# Altium PCB DS172-1.0-A滴定计数器.PcbDoc
Units mm, origin at the board's own origin, x right, y up, seen from the top; angles counter-clockwise.
Board outline 48 x 61 mm, 2 copper layers (Top Layer, Bottom Layer), stack 1.581 mm thick; 36 components, 41 nets, 164 pads, 50 vias.
Unrouted connection lines stored in the file: 33.
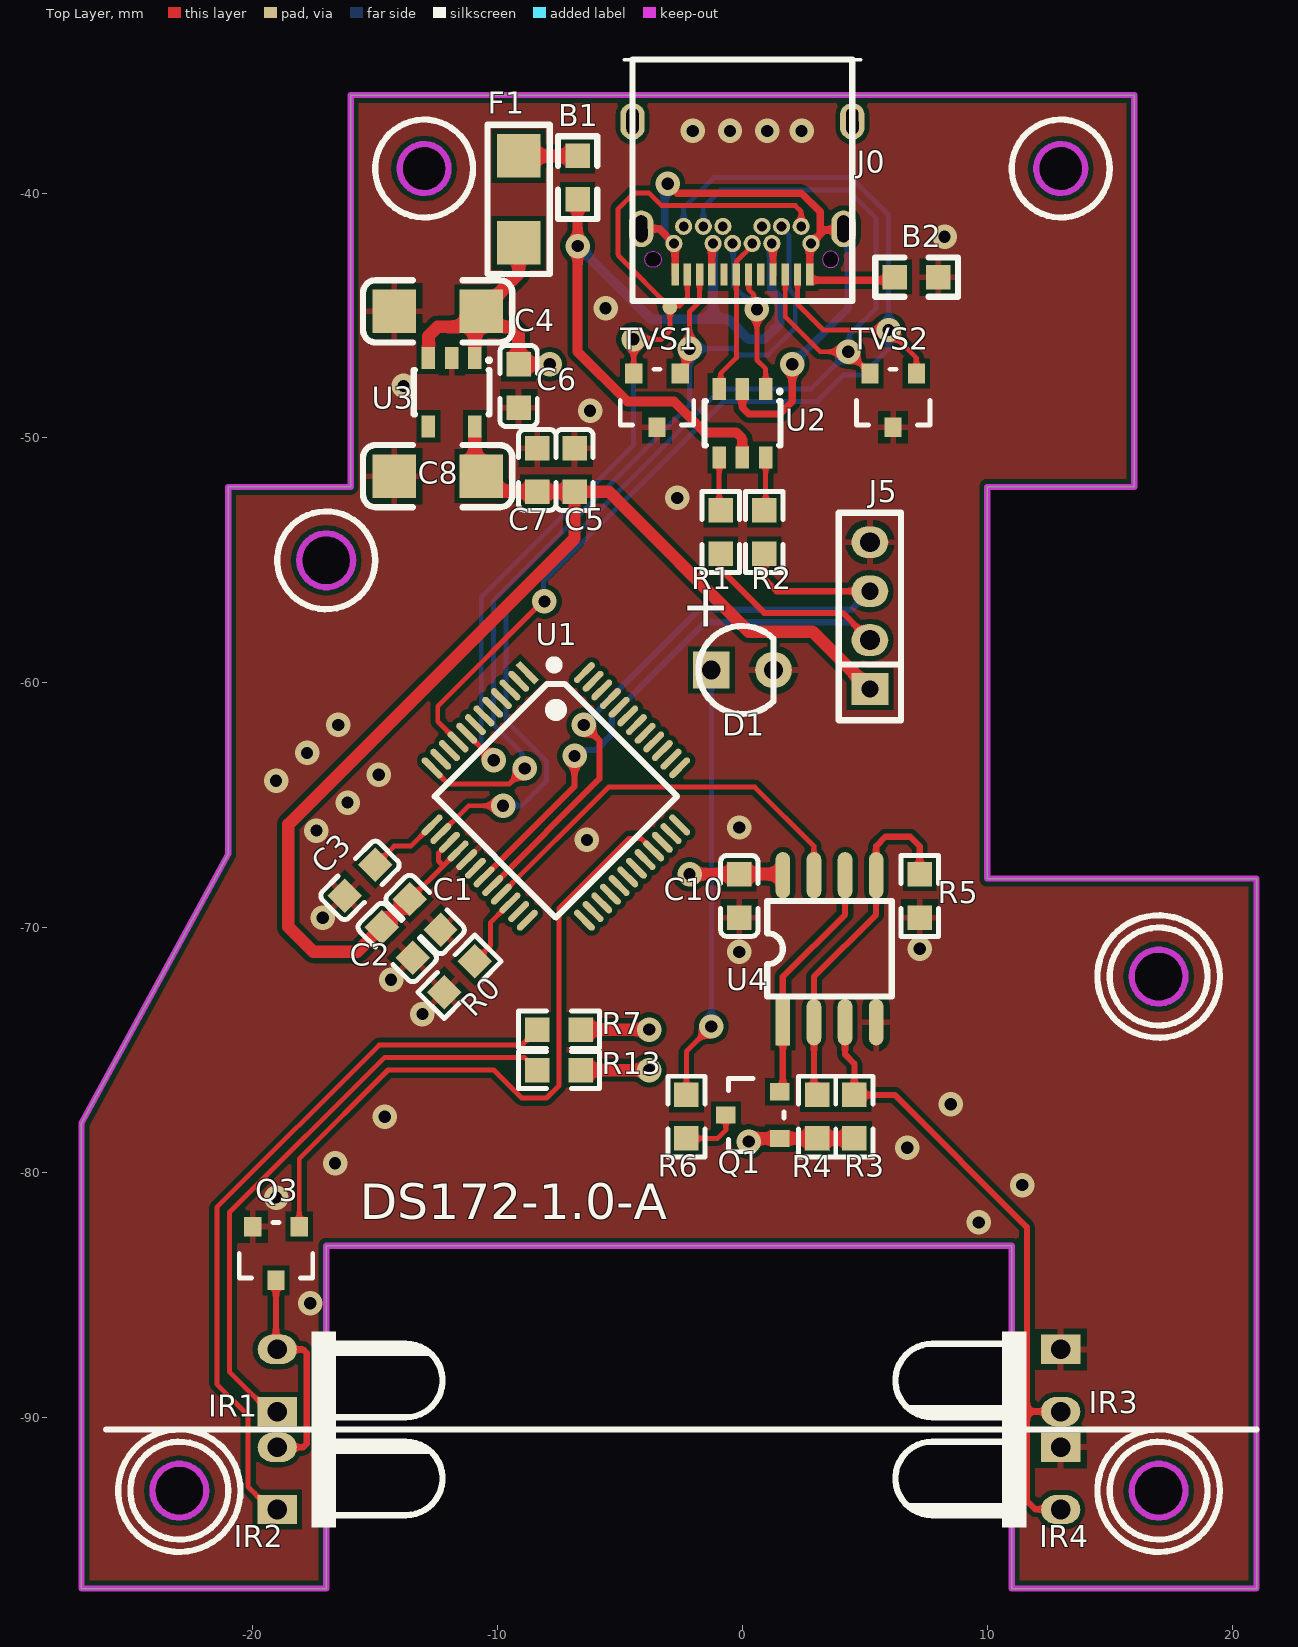
[diagram p0: Top Layer view]
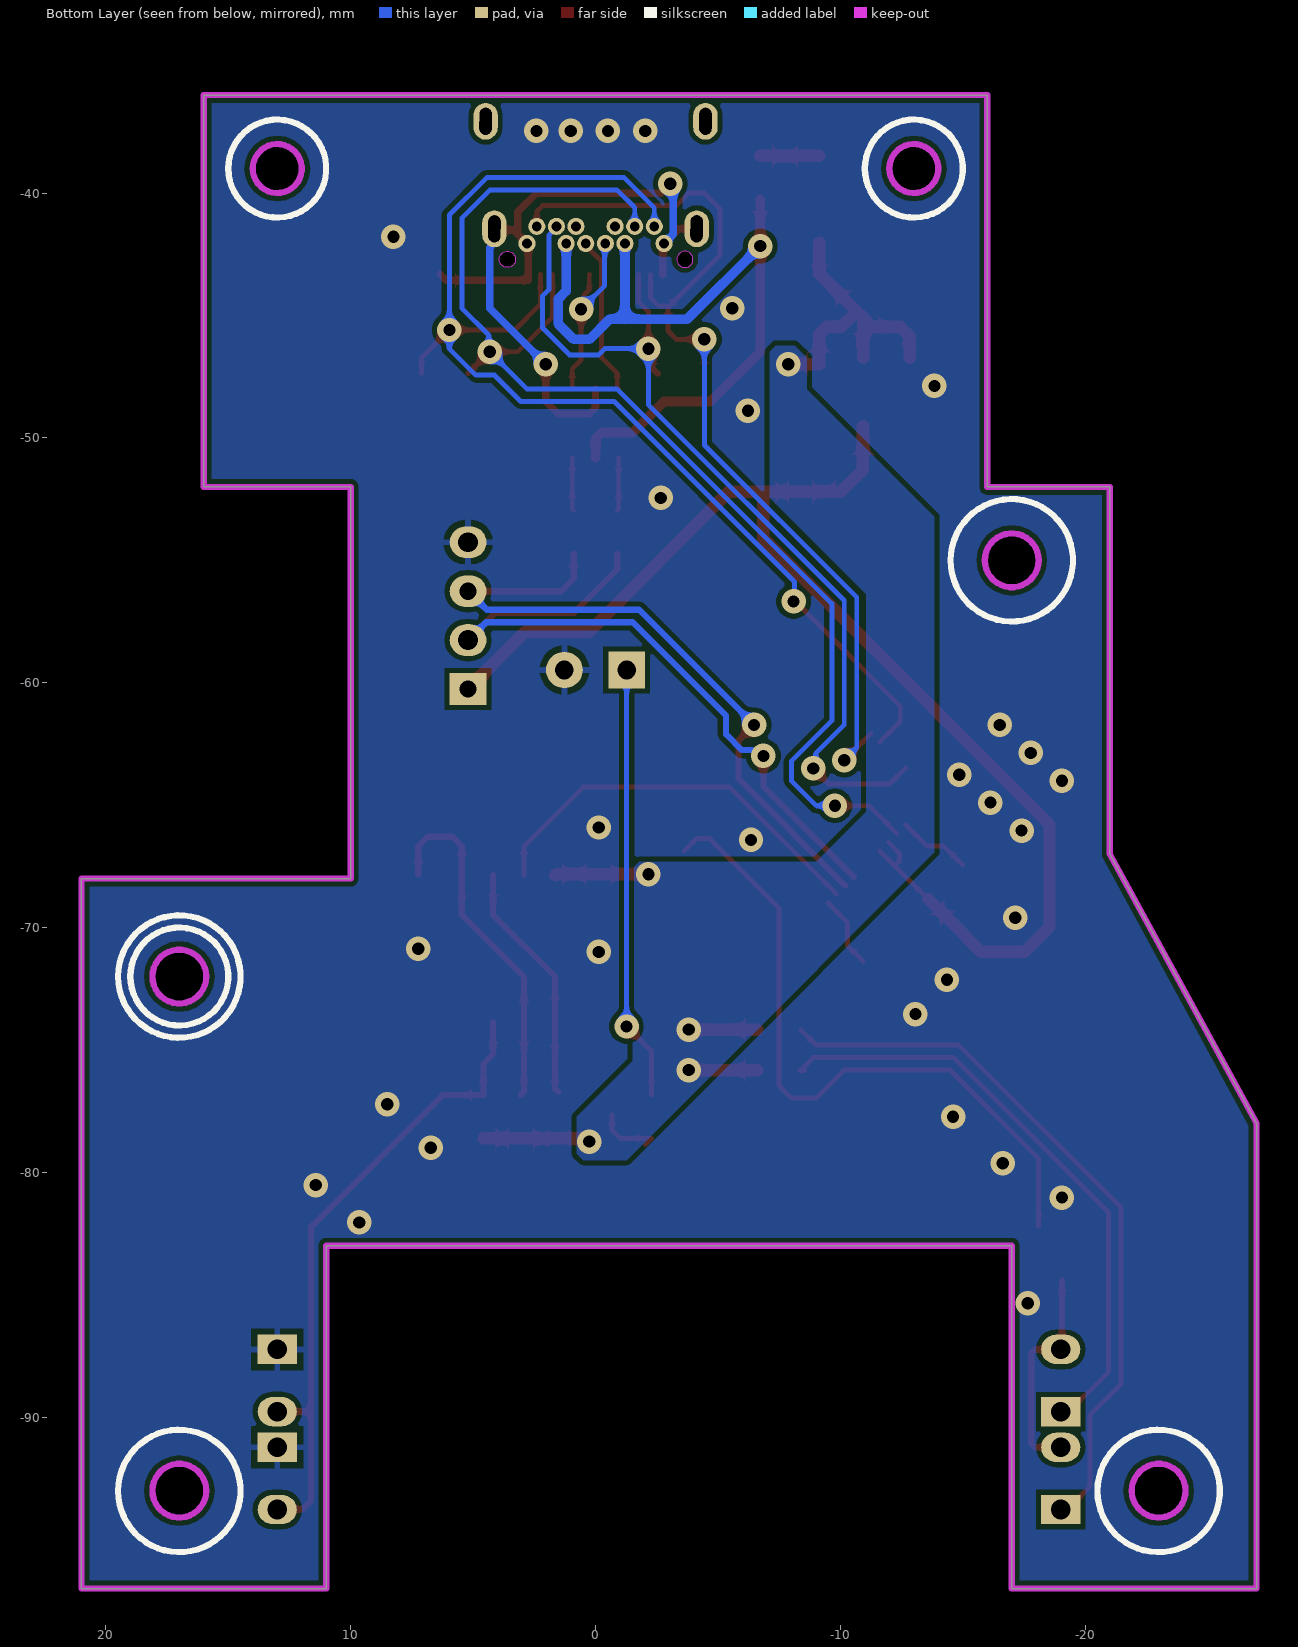
[diagram p1: Bottom Layer view, seen from below]

## Layer stack, top to bottom
Top Solder: solder mask 0.0102, Solder Resist, Dk 3.5
Top Layer: signal copper 0.0356
Dielectric 1: dielectric 1.51, FR-4, Dk 4.8
Bottom Layer: signal copper 0.0356
Bottom Solder: solder mask 0.0102, Solder Resist, Dk 3.5

## Board outline
-27,-97 -17,-97 -17,-83 11,-83 11,-97 21,-97 21,-68 10,-68 10,-52 16,-52 16,-36 -16,-36 -16,-52 -21,-52 -21,-67 -27,-78
cut-out: -14,-39 ccw(c-13,-39) -13,-40 ccw(c-13,-39) -12,-39 ccw(c-13,-39) -13,-38 ccw(c-13,-39)
cut-out: -21.9,-93 cw(c-23,-93) -23,-94.1 cw(c-23,-93) -24.1,-93 cw(c-23,-93) -23,-91.9 cw(c-23,-93)
cut-out: 15.9,-93 ccw(c17,-93) 17,-94.1 ccw(c17,-93) 18.1,-93 ccw(c17,-93) 17,-91.9 ccw(c17,-93)
cut-out: 15.9,-72 ccw(c17,-72) 17,-73.1 ccw(c17,-72) 18.1,-72 ccw(c17,-72) 17,-70.9 ccw(c17,-72)
cut-out: -18.1,-55 ccw(c-17,-55) -17,-56.1 ccw(c-17,-55) -15.9,-55 ccw(c-17,-55) -17,-53.9 ccw(c-17,-55)
cut-out: 12,-39 ccw(c13,-39) 13,-40 ccw(c13,-39) 14,-39 ccw(c13,-39) 13,-38 ccw(c13,-39)

## Design rules (kind name [scope] priority, off if disabled: settings)
Clearance [All] p1: gap=0.2 ignorepadtopadclearanceinfootprint=TRUE
MinimumSolderMaskSliver [All] p1: minsoldermaskwidth=0.2
PolygonConnect GND [All] p1: thpad.connectstyle=Relief thpad.reliefconductorwidth=0.254 thpad.reliefentries=4 thpad.polygonreliefangle="90 Angle" thpad.airgapwidth=0.254 smdpad.connectstyle=Relief smdpad.reliefconductorwidth=0.254 smdpad.reliefentries=4 smdpad.polygonreliefangle="90 Angle" smdpad.airgapwidth=0.254 via.connectstyle=Direct via.reliefconductorwidth=0.254 via.reliefentries=4 via.polygonreliefangle="90 Angle" via.airgapwidth=0.254
PolygonConnect VSS [InNet('VSS') vs InNet('VSS')] p2: thpad.connectstyle=Relief thpad.reliefconductorwidth=0.508 thpad.reliefentries=4 thpad.polygonreliefangle="90 Angle" thpad.airgapwidth=0.254 smdpad.connectstyle=Relief smdpad.reliefconductorwidth=0.508 smdpad.reliefentries=4 smdpad.polygonreliefangle="90 Angle" smdpad.airgapwidth=0.254 via.connectstyle=Direct via.reliefconductorwidth=0.508 via.reliefentries=4 via.polygonreliefangle="90 Angle" via.airgapwidth=0.254
RoutingVias [All] p1: holewidth=0.6 width=1 viastyle="Through Hole" minholewidth=0.4 minwidth=0.8 maxholewidth=1 maxwidth=2
SilkToSilkClearance [All] p1: silktosilkclearance=0.1
SilkToSolderMaskClearance [IsPad] p1: minsilkscreentomaskgap=0.05 clearancetoexposedcopper=TRUE
SolderMaskExpansion [All] p1: expansion=0.102 istentingtop=FALSE
Width [All] p1: maxlimit=1 minlimit=0.2 preferedwidth=0.2
27 further rules are at their usual default settings.

## Classes and differential pairs
net class U1_Nets: ADC0 ADC1 DAC_OUT Dis1_red_EN Dis2_green_EN Dis3_blue_EN GND I2C1_SCL I2C1_SDA IRT_EN KEY_HOME NetU1_1 NetU1_2 NetU1_3 NetU1_4 NetU1_7 NetU1_11 NetU1_23 NetU1_24 NetU1_25 NetU1_26 NetU1_30 NetU1_32 NetU1_39 NetU1_40 NetU1_41 NetU1_42 NetU1_43 NetU1_44 NetU1_45 NetU1_46 NetU1_47 NetU1_48 P3.0/D-/RxD P3.1/D+/TxD P3.3 SPI1/SPI2_CS SPI1_MISO SPI1_MOSI SPI1_SCK SPI2_MISO SPI2_MOSI SPI2_SCK UCAP USART2_RXD USART2_TXD VCC_3V3_MCU
net class R0_Nets: GND P3.3
net class C3_Nets: GND UCAP
net class U4_Nets: GND KEY_HOME NetIR3_2 NetQ1_2 NetR4_1 VCC_5V
net class TVS2_Nets: GND SPI1/SPI2_CS SPI1_SCK
net class TVS1_Nets: GND SPI1_MISO SPI1_MOSI
net class R7_Nets: NetIR2_1 VCC_5V
net class R6_Nets: NetD1_1 NetQ1_3
net class R5_Nets: GND NetR4_1
net class R4_Nets: NetR4_1 VCC_5V
net class R3_Nets: NetIR3_2 VCC_5V
net class R2_Nets: P3.1/D+/TxD USB_D+
net class R1_Nets: P3.0/D-/RxD USB_D-
net class Q3_Nets: Dis_red_EN GND IRT_EN NetIR1_2
net class Q1_Nets: NetQ1_2 NetQ1_3 VCC_5V
net class IR4_Nets: GND NetIR3_2
net class IR3_Nets: GND NetIR3_2
net class IR2_Nets: NetIR1_2 NetIR2_1
net class IR1_Nets: NetIR1_1 NetIR1_2
net class C1_Nets: GND VCC_3V3_MCU
net class C2_Nets: GND VCC_3V3_MCU
net class R13_Nets: NetIR1_1 VCC_5V
net class J5_Nets: GND P3.0/D-/RxD P3.1/D+/TxD VCC_3V3_MCU
net class D1_Nets: GND NetD1_1
net class J0_Nets: D+_I/O1 D-_I/O2 NetJ0_A5 NetJ0_A8 NetJ0_B5 NetJ0_B8 SPI1/SPI2_CS SPI1_MISO SPI1_MOSI SPI1_SCK VBUS VSS
net class F1_Nets: NetB1_2 VCC_5V
net class C7_Nets: GND VCC_3V3_MCU
net class C4_Nets: GND VCC_5V
net class B2_Nets: GND VSS
net class B1_Nets: NetB1_2 VBUS
net class U3_Nets: GND VCC_3V3_MCU VCC_5V
net class U2_Nets: D+_I/O1 D-_I/O2 USB_D+ USB_D- VBUS VSS
net class C10_Nets: GND VCC_5V
net class C5_Nets: GND VCC_3V3_MCU
net class C8_Nets: GND VCC_3V3_MCU
net class C6_Nets: GND VCC_5V

## Components (designator, comment, footprint, x,y, rotation, side; value= is the part's Value field where it differs from the comment)
B1 "CBM160808U102" 0603Bead -6.731,-39.37 r90 top
B2 "CBM160808U102" 0603Bead 7.112,-43.434 r0 top
C1 "SMDCAP00013" 0603CAP -12.96,-69.463 r135 top value=100nF
C2 "SMDCAP00012" 0603CAP -14.097,-70.612 r135 top value=4.7uF
C3 "SMDCAP00015" 0603CAP -15.621,-68.072 r45 top value=1uF
C4 "MLCC 10uF 50V ±20％ 1206" 1206CAP -12.446,-44.831 r0 top value=10uF
C5 "SMDCAP00013" 0603CAP -6.858,-51.308 r270 top value=100nF
C6 "SMDCAP00015" 0603CAP -9.144,-47.879 r90 top value=1uF
C7 "SMDCAP00015" 0603CAP -8.382,-51.308 r270 top value=1uF
C8 "MLCC 10uF 50V ±20％ 1206" 1206CAP -12.446,-51.562 r0 top value=10uF
C10 "SMDCAP00013" 0603CAP -0.127,-68.708 r90 top value=100nF
D1 "Φ3 透明发红 DIP2" LED_3mm_red 0,-59.48 r0 top locked value=red
F1 "SMD1206-050C-16V" 1206FUSE -9.144,-40.259 r270 top value="16V /0.5A"
IR1 "IR204-A" LED_IR_W_3mm -19,-88.5 r0 top locked
IR2 "IR204-A" LED_IR_W_3mm -19,-92.5 r0 top locked
IR3 "SE000000002" LED_IR_W_3mm 13,-88.5 r180 top locked value=PT204-6B
IR4 "SE000000002" LED_IR_W_3mm 13,-92.5 r180 top locked value=PT204-6B
J0 "USB_Type_C_24P" USB_TYPE_C_24P_Receptacle 0,-40.2 r180 top locked
J5 "DIP4单排直针  间距2mm 针长11mm 铜" H4 5.207,-60.261 r90 top value=4P
Q1 "SMDIC000037" SOT23 0.424,-77.658 r90 top value=DTC114ECA
Q3 "SMDIC000037" SOT23 -19.05,-83.312 r180 top value=DTC114ECA
R0 "Chip 0R 1/16W ±1％ 0603" 0603RES -11.557,-72.009 r45 top value=0R
R1 "Chip 22R 1/16W ±1％ 0603" 0603RES -0.889,-53.848 r90 top value=22R
R2 "Chip 22R 1/16W ±1％ 0603" 0603RES 0.889,-53.848 r90 top value=22R
R3 "Chip 120K 1/16W ±1％ 0603" 0603RES 4.572,-77.724 r270 top value=120K
R4 "SMDRES00047" 0603RES 3.048,-77.724 r270 top value=4.7K
R5 "SMDRES00034" 0603RES 7.239,-68.707 r90 top value=1K
R6 "SMDRES00034" 0603RES -2.286,-77.724 r270 top value=1K
R7 "SMDRES00015" 0603RES -7.493,-74.168 r0 top value=100R
R13 "SMDRES00015" 0603RES -7.493,-75.819 r0 top value=100R
TVS1 "MMBZ9V1A" SOT23 -3.49,-48.471 r180 top
TVS2 "MMBZ9V1A" SOT23 6.157,-48.471 r180 top
U1 "STC32G12K128_35I LQFP48" LQFP-48 -7.62,-64.643 r315 top value=STC32G12K128
U2 "82400102" SOT23-6 0,-49.4 r180 top
U3 "ME6211C33M5G-N" SOT23-5 -11.877,-48.13 r180 top
U4 "SMDIC000034" SO-8 3.556,-70.866 r90 top value=LM358

## Footprints (in the part's own frame and the unit in brackets; to place one, negate y for a bottom-side part, rotate by r counter-clockwise, add the part's x,y. Pads: shape width x height; smd on the part's side, far side on the other; paste and mask are expansions set on the pad)
0603Bead [mm]
  rect 1x1 smd: 1(-0.889,0) 2(0.889,0)
  silkscreen extent -1.69,-0.8 1.69,0.8, body extent -0.9,-0.48 0.85,0.48, height 0.95
0603CAP [mm]
  rect 1x1 smd: 1(-0.889,0) 2(0.89,0)
  silkscreen extent -1.65,-0.76 1.65,0.76, body extent -0.8,-0.4 0.8,0.4, height 0.3
0603RES [mm]
  rect 1x1 smd: 1(-0.889,0) 2(0.889,0)
  silkscreen extent -1.65,-0.76 1.65,0.76, body extent -0.8,-0.41 0.8,0.41, height 0.51
1206CAP [mil]
  rect 70x70 smd: 1(-70,0) 2(70,0)
  silkscreen extent -120,-50 120,50, body extent -73,-38 73,38, height 47
1206FUSE [mil]
  rect 70x70 smd: 1(-70,0) 2(70,0)
  silkscreen extent -120,-50 120,50, body extent -63,-33 63,33, height 57
H4 [mm]
  rect 1.3x1.5 hole 0.7: 1(0,0)
  oval 1.3x1.5 hole 0.813: 2(2,0) 4(6,0)
  oval 1.3x1.5 hole 0.7: 3(4,0)
  silkscreen extent -1.27,-1.27 7.2,1.27, body extent -0.97,-1 6.98,1, height 6
LED_3mm_red [mm]
  rect 1.5x1.5 hole 0.76: 1(-1.27,0)
  round 1.5 hole 0.76: 2(1.27,0)
  silkscreen extent -1.8,-1.8 1.27,1.8, body extent -1.9,-1.9 1.53,1.9, height 14.89
LED_IR_W_3mm [mm] "Typical RED GaAs LED; 2 Leads"
  rect 1.6x1.2 hole 0.8: 1(0,-1.27)
  oval 1.6x1.2 hole 0.8: 2(0,1.27)
  silkscreen extent 1.4,-2 6.75,2, body extent -0.25,-2 6.5,1.55, height 4
LQFP-48 [mm]
  rect 1.1x0.27 smd mask+0.08: 1(-4.4,2.75)
  oval 1.1x0.27 smd mask+0.08: 2(-4.4,2.25) 3(-4.4,1.75) 4(-4.4,1.25) 5(-4.4,0.75) 6(-4.4,0.25) 7(-4.4,-0.25) 8(-4.4,-0.75) 9(-4.4,-1.25) 10(-4.4,-1.75) 11(-4.4,-2.25) 12(-4.4,-2.75) 25(4.4,-2.75) 26(4.4,-2.25) 27(4.4,-1.75) 28(4.4,-1.25) 29(4.4,-0.75) 30(4.4,-0.25) 31(4.4,0.25) 32(4.4,0.75) 33(4.4,1.25) 34(4.4,1.75) 35(4.4,2.25) 36(4.4,2.75)
  oval 0.27x1.1 smd mask+0.08: 13(-2.75,-4.4) 14(-2.25,-4.4) 15(-1.75,-4.4) 16(-1.25,-4.4) 17(-0.75,-4.4) 18(-0.25,-4.4) 19(0.25,-4.4) 20(0.75,-4.4) 21(1.25,-4.4) 22(1.75,-4.4) 23(2.25,-4.4) 24(2.75,-4.4) 37(2.75,4.4) 38(2.25,4.4) 39(1.75,4.4) 40(1.25,4.4) 41(0.75,4.4) 42(0.25,4.4) 43(-0.25,4.4) 44(-0.75,4.4) 45(-1.25,4.4) 46(-1.75,4.4) 47(-2.25,4.4) 48(-2.75,4.4)
  silkscreen extent -3.95,-3.5 3.5,3.85, body extent -4.51,-4.5 4.5,4.5, height 1.54
SO-8 [mm]
  rect 1.9x0.6 smd: 1(-3,1.905)
  oval 1.9x0.6 smd: 2(-3,0.635) 3(-3,-0.635) 4(-3,-1.905) 5(3,-1.905) 6(3,-0.635) 7(3,0.635) 8(3,1.905)
  silkscreen extent -1.95,-2.54 1.95,2.54, body extent -3.07,-2.44 3.07,2.44, height 1.77
SOT23 [mm]
  rect 0.7x0.8 smd: 1(-0.95,-1.1) 2(0.95,-1.1) 3(0,1.1)
  silkscreen extent -1.5,-1.27 1.5,1, body extent -1.46,-1.17 1.46,1.17, height 1
SOT23-5 [mm] "SOT-23/SC-74A; 5 Leads; Body 3.1 x 3 mm, inc. leads (LxW max)"
  rect 0.55x0.9 smd: 1(-0.95,-1.4) 2(0,-1.4) 3(0.95,-1.4) 4(0.95,1.4) 5(-0.95,1.4)
  silkscreen extent -1.59,-1.36 1.55,0.9, body extent -1.45,-1.4 1.45,1.4, height 1.45
SOT23-6 [mm] "SOT-23/SC-74A; 5 Leads; Body 3.1 x 3 mm, inc. leads (LxW max)"
  rect 0.55x0.9 smd: 1(-0.95,-1.4) 2(0,-1.4) 3(0.95,-1.4) 4(0.95,1.4) 5(0,1.4) 6(-0.95,1.4)
  silkscreen extent -1.59,-1.36 1.55,0.9, body extent -1.45,-1.4 1.45,1.4, height 1.45
USB_TYPE_C_24P_Receptacle [mm]
  oval 1x1.5 hole 0.5 slot 1.1 at 90.5 deg: 0(-4.49,-3.13) 0(-4.13,1.26) 0(4.13,1.26) 0(4.49,-3.13)
  rect 0.3x0.9 smd mask+0.1: A1(-2.75,3.13) A2(-2.25,3.13) A3(-1.75,3.13) A4(-1.25,3.13) A5(-0.75,3.13) A6(-0.25,3.13) A7(0.25,3.13) A8(0.75,3.13) A9(1.25,3.13) A10(1.75,3.13) A11(2.25,3.13) A12(2.75,3.13)
  round 0.7 hole 0.4: B1(2.8,1.86) B2(2.4,1.16) B3(1.6,1.16) B4(1.2,1.86) B5(0.8,1.16) B6(0.4,1.86) B7(-0.4,1.86) B8(-0.8,1.16) B9(-1.2,1.86) B10(-1.6,1.16) B11(-2.4,1.16) B12(-2.8,1.86)
  Keep-Out Layer board cut-out: 3.98,2.51 3.955,2.384 3.883,2.277 3.776,2.205 3.65,2.18 3.65,2.18 3.524,2.205 3.417,2.277 3.345,2.384 3.32,2.51 3.32,2.51 3.345,2.636 3.417,2.743 3.524,2.815 3.65,2.84 3.65,2.84 3.776,2.815 3.883,2.743 3.955,2.636 3.98,2.51
  Keep-Out Layer board cut-out: -3.93,2.51 -3.905,2.384 -3.833,2.277 -3.726,2.205 -3.6,2.18 -3.6,2.18 -3.474,2.205 -3.367,2.277 -3.295,2.384 -3.27,2.51 -3.27,2.51 -3.295,2.636 -3.367,2.743 -3.474,2.815 -3.6,2.84 -3.6,2.84 -3.726,2.815 -3.833,2.743 -3.905,2.636 -3.93,2.51
  silkscreen extent -4.48,-5.66 4.48,4.21, body extent -4.87,-5.66 4.88,4.21, height 3.36

## Part data
B1 B2: library part "Chip Ferrite Bead 0606", "贴片磁珠"
C1 C5 C10: library part "MLCC 100nF 50V ±10％ 0603", "贴片电容"
C2: library part "MLCC 4.7uF 50V ±10％ 0603", "贴片电容"
C3 C6 C7: library part "MLCC 1uF 50V ±10％ 0603", "贴片电容"
C4 C8: "贴片电容"
D1: "插件LED"
F1: "贴片自恢复保险丝 16V /0.5A"
IR1 IR2: "红外发射管DIP2 Φ3"
IR3 IR4: library part PT204-6B, "红外接收管DIP2 Φ3"
J5: "单排直针"
Q1 Q3: library part "DTC114ECA SOT-23 长电", "数字晶体管"
R0 R1 R2 R3: "贴片电阻"
R4: library part "Chip 4.7K 1/16W ±1％ 0603", "贴片电阻"
R5 R6: library part "Chip 1K 1/16W ±1％ 0603", "贴片电阻"
R7 R13: library part "Chip 100R 1/16W ±1％ 0603", "贴片电阻"
TVS1 TVS2: library part TVS, "瞬态抑制二极管"
U1: "单片机芯片"
U2: "瞬态抑制二极管(TVS)"
U3: "稳压芯片"
U4: library part "LM358 SOP-8 ST", "运放芯片"

## Free pads (board coordinates)
  round 0.6 smd mask+0.102: 0(-2.961,-44.664)

## Via types
v1: diameter 1, hole 0.5, Top Layer to Bottom Layer, tented both sides, 50 vias

## Nets (pads, with @x,y where several pads share a name; then routed paths per layer and width w, separated by ;. In a path a pad name is that pad's centre, name@x,y a point inside that pad or via, vN(x,y) a via of type N, cw(c..) or ccw(c..) an arc to the next point about the centre after c; other vN are vias at no path point)
ADC0: U1.5
ADC1: U1.6
D+_I/O1: J0.A6 J0.B6 U2.1 | length 8.1
  Top Layer w0.2: J0.A6 0.258,-43.338 0.258,-43.946 0.457,-44.145 0.457,-44.609 v1(0.59,-44.743) 0.59,-46.818 0.95,-47.178 U2.1
  Bottom Layer w0.2: J0.B6 -0.374,-42.086 -0.374,-43.779 v1(0.59,-44.743)
D-_I/O2: J0.A7 J0.B7 U2.3 | length 6.5
  Top Layer w0.2: U2.3 -0.885,-47.935 -0.885,-47.367 -0.25,-46.732 J0.A7 -0.25,-42.796 0.4,-42.146 J0.B7
DAC_OUT: U1.10
Dis1_red_EN: U1.35
Dis2_green_EN: U1.34
Dis3_blue_EN: U1.36
GND: B2.2 C1.1 C2.1 C3.1 C4.1 C5.1 C6.1 C7.1 C8.1 C10.1 D1.2 IR3.1 IR4.1 J5.4 Q3.2 R0.1 R5.1 TVS1.3 TVS2.3 U1.17 U3.2 U4.4
  other v1: -17.653,-85.344 9.652,-82.042 -19.05,-81.026 11.43,-80.518 -16.637,-79.629 6.731,-78.994 -14.605,-77.724 8.509,-77.216 -13.068,-73.533 -14.351,-72.136 -0.127,-70.993 7.239,-70.866 -17.145,-69.596 -6.35,-66.421 -17.399,-66.04 -0.127,-65.913 -16.129,-64.897 -19.05,-64.008 -14.859,-63.754 -17.78,-62.865 -16.51,-61.722 -2.667,-52.451 -6.223,-48.895 -13.843,-47.879 -5.588,-44.704 8.255,-41.783 -2.032,-37.465 -0.508,-37.465 1.016,-37.465 2.413,-37.465
I2C1_SCL: U1.38
I2C1_SDA: U1.37
IRT_EN: Q3.1 U1.33 | length 28.1
  Top Layer w0.2: Q3.1 -18.1,-79.441 -14.478,-75.819 -10.16,-75.819 -9.017,-76.962 -8.001,-76.962 -7.493,-76.454 -7.493,-69.215 -4.632,-66.354 -4.141,-66.354 U1.33
KEY_HOME: U1.21 U4.7 | length 16.8
  Top Layer w0.2: U1.21 -5.471,-64.262 0.508,-64.262 2.921,-66.675 U4.7
NetB1_2: B1.2 F1.1 | length 2.4
  Top Layer w0.508: F1.1 B1.2
NetD1_1: D1.1 R6.1 | length 17.8
  Top Layer w0.2: R6.1 -2.286,-75.057 v1(-1.27,-74.041)
  Bottom Layer w0.2: v1(-1.27,-74.041) D1.1
NetIR1_1: IR1.1 R13.1 | length 24.7
  Top Layer w0.2: IR1.1 -19.323,-89.77 -20.955,-88.138 -20.955,-81.639 -14.627,-75.311 -8.89,-75.311 R13.1
  Top Layer w0.254: R13.1@-8.509,-75.819 R13.1
NetIR1_2: IR1.2 IR2.2 Q3.3 | length 9.1
  Top Layer w0.254: Q3.3 -19.05,-87.18 IR1.2 -17.948,-87.23 -17.799,-87.379 -17.799,-91.081 -17.948,-91.23 IR2.2
NetIR2_1: IR2.1 R7.1 | length 29.6
  Top Layer w0.2: IR2.1 -19.5,-93.27 -19.76,-93.27 -20.193,-92.837 -20.193,-89.916 -21.463,-88.646 -21.463,-81.429 -14.837,-74.803 -9.017,-74.803 R7.1
NetIR3_2: IR3.2 IR4.2 R3.1 U4.3 | length 26.5
  Top Layer w0.254: U4.3 4.191,-75.184 4.572,-75.565 R3.1 6.223,-76.835 11.621,-82.232 11.621,-89.77 ; IR4.2 12.986,-93.756 11.968,-93.756 11.621,-93.408 11.621,-89.77 ; IR3.2 11.621,-89.77
NetQ1_2: Q1.2 U4.1 U4.6 | length 9.9
  Top Layer w0.254: Q1.2 1.651,-76.581 U4.1 1.651,-72.009 4.191,-69.469 U4.6
NetQ1_3: Q1.3 R6.2 | length 2.7
  Top Layer w0.2: R6.2@-2.032,-78.867 R6.2 -1.016,-78.613 -0.676,-78.273 Q1.3
NetR4_1: R4.1 R5.2 U4.2 U4.5 | length 14.5
  Top Layer w0.254: R4.1 2.921,-76.708 U4.2 2.921,-72.009 5.461,-69.469 U4.5 5.461,-66.675 5.842,-66.294 6.858,-66.294 7.239,-66.675 R5.2
P3.0/D-/RxD: J5.2 R1.1 U1.19 | length 29.5
  Top Layer w0.254: U1.19 -6.858,-64.235 v1(-6.858,-62.992) ; R1.1 -0.889,-55.372 0.889,-57.15 4.096,-57.15 J5.2
  Bottom Layer w0.254: v1(-6.858,-62.992) -6.656,-62.992 -6.414,-62.75 -5.981,-62.75 -5.334,-62.103 -5.334,-61.341 -1.524,-57.531 4.477,-57.531 J5.2
P3.1/D+/TxD: J5.3 R2.1 U1.20 | length 28.1
  Top Layer w0.254: U1.20 -5.842,-63.926 -5.842,-62.357 v1(-6.477,-61.722) ; R2.1 0.889,-55.753 1.397,-56.261 J5.3
  Bottom Layer w0.254: v1(-6.477,-61.722) -1.778,-57.023 4.445,-57.023 J5.3
P3.3: R0.2 U1.22 | length 3
  Top Layer w0.2: R0.2 -10.287,-70.739 -10.287,-69.785 U1.22
SPI1/SPI2_CS: J0.A3 J0.B3 TVS2.2 U1.14 | length 52
  Top Layer w0.2: U1.14 -11.183,-65.024 v1(-9.779,-65.024) ; J0.A3 1.75,-45.057 3.175,-46.482 v1(4.318,-46.482) TVS2.2
  Bottom Layer w0.2: v1(-9.779,-65.024) -9.017,-65.024 -8.001,-64.008 -8.001,-63.202 -9.652,-61.551 -9.652,-56.769 -0.889,-48.006 2.794,-48.006 4.366,-46.434 4.366,-45.799 5.461,-44.704 5.461,-41.021 4.318,-39.878 -0.889,-39.878 -1.6,-40.589 J0.B3
SPI1_MISO: J0.A11 J0.B11 pad.0 TVS1.2 U1.8 | length 40.9
  Top Layer w0.2: U1.8 v1(-10.16,-63.164) ; TVS1.2 -4.445,-47.366 v1(-4.445,-45.974) -3.302,-45.974 -2.961,-45.633 pad.0 ; J0.A11 -2.25,-44.287 -2.57,-44.607 -2.904,-44.607 pad.0 ; J0.B11 2.401,-40.754 2.16,-40.513 -3.301,-40.513 -3.809,-40.005 -4.444,-40.005 -5.079,-40.64 -5.079,-42.462 ccw(c-4.879,-42.462) -5.021,-42.604 pad.0
  Bottom Layer w0.2: v1(-10.16,-63.164) -10.668,-62.656 -10.668,-56.515 -4.445,-50.292 v1(-4.445,-45.974)
SPI1_MOSI: J0.A10 J0.B10 TVS1.1 U1.12 | length 38.9
  Top Layer w0.2: U1.12 -12.017,-64.135 -9.525,-64.135 v1(-8.89,-63.5) ; v1(-2.159,-46.355) -2.159,-44.837 -1.75,-44.428 J0.A10
  Top Layer w0.254: TVS1.1 -2.317,-47.148 -2.317,-46.715 -2.159,-46.557 v1(-2.159,-46.355)
  Bottom Layer w0.2: v1(-8.89,-63.5) -9.002,-63.388 -9.002,-62.88 -10.16,-61.722 -10.16,-56.642 -2.159,-48.641 v1(-2.159,-46.355) -0.381,-46.355 -0.127,-46.609 1.061,-46.609 2.159,-45.511 2.159,-44.197 1.905,-43.943 1.905,-41.727 1.6,-41.422 J0.B10
SPI1_SCK: J0.A2 J0.B2 TVS2.1 U1.9 | length 50.1
  Top Layer w0.2: U1.9 -12.446,-61.585 -12.446,-60.96 -8.168,-56.682 v1(-8.088,-56.682) ; J0.A2 2.25,-44.541 3.302,-45.593 v1(5.969,-45.593) 7.107,-46.731 TVS2.1
  Bottom Layer w0.2: v1(-8.088,-56.682) -8.128,-56.642 -8.128,-55.88 -0.762,-48.514 3.048,-48.514 4.127,-47.434 4.889,-47.434 5.969,-46.355 v1(5.969,-45.593) 5.969,-40.895 4.444,-39.37 -1.168,-39.37 -2.4,-40.602 J0.B2
SPI2_MISO: U1.29
SPI2_MOSI: U1.18
SPI2_SCK: U1.31
UCAP: C3.2 U1.13 | length 3
  Top Layer w0.2: C3.2 -14.224,-66.675 -13.541,-66.675 U1.13
USART2_RXD: U1.27
USART2_TXD: U1.28
USB_D+: R2.2 U2.6 | length 2.2
  Top Layer w0.2: R2.2 0.95,-52.898 U2.6
USB_D-: R1.2 U2.4 | length 2.2
  Top Layer w0.2: U2.4 -0.95,-52.898 R1.2
VBUS: B1.1 J0.A4 J0.A9 J0.B4 J0.B9 U2.5 | length 34.4
  Top Layer w0.254: J0.B9 J0.B9@1.25,-42.11
  Top Layer w0.3: J0.A9 -1.25,-42.11 J0.B4 ; J0.A4 J0.B9@1.25,-42.11
  Top Layer w0.4: B1.1 v1(-6.731,-42.164) -6.731,-46.482 -4.699,-48.514 -2.794,-48.514 -1.524,-49.784 -0.254,-49.784 -0.006,-50.032 -0.006,-50.794 U2.5
  Bottom Layer w0.4: v1(-6.731,-42.164) -3.74,-45.155 -1.2,-45.155 ; J0.B4 -1.2,-45.155 ; J0.B9 1.2,-44 1.524,-44.324 1.524,-45.34 0.889,-45.975 0.254,-45.975 -0.566,-45.155 -1.2,-45.155
VCC_3V3_MCU: C1.2 C2.2 C5.2 C7.2 C8.2 J5.1 U1.15 U1.16 U3.5 | length 54.5
  Top Layer w0.2: C1.2@-13.583,-68.84 -12.186,-67.443 ; U1.15 -12.412,-66.96 -12.412,-67.282 -12.251,-67.443 -12.186,-67.443 ; U1.16@-11.615,-66.871 -12.186,-67.443
  Top Layer w0.508: C1.2 -15.229,-70.474 -15.229,-70.486 -15.737,-70.993 -17.526,-70.993 -18.542,-69.977 -18.542,-65.786 -6.858,-54.102 C5.2 ; U3.5 -10.922,-49.535 -10.922,-51.308 C8.2 -10.032,-52.198 C7.2 C5.2 ; J5.1 2.858,-57.912 0.254,-57.912 -5.46,-52.198 C5.2
VCC_5V: C4.2 C6.2 C10.2 F1.2 Q1.1 R3.2 R4.2 R7.2 R13.2 U3.1 U3.3 U4.8 | length 26.7
  Top Layer w0.508: U3.3 -12.827,-45.847 -12.446,-45.466 -11.303,-45.466 C4.2@-10.927,-45.09 ; U3.1 C4.2@-10.927,-45.09 ; F1.2 -9.144,-43.307 C4.2 ; v1(-7.874,-46.99) v1(-7.874,-46.99) C6.2 -9.144,-45.764 -9.442,-45.466 -10.033,-45.466 C4.2 ; R13.2 v1(-3.81,-75.819) ; R7.2 v1(-3.81,-74.168) ; v1(-2.159,-67.818) 1.603,-67.818 U4.8 ; v1(0.254,-78.74) 0.386,-78.608 Q1.1 1.529,-78.613 R4.2 R3.2 ; C4.2@-10.927,-45.09 C4.2
VSS: B2.1 J0.0@4.13,-41.46 J0.0@-4.13,-41.46 J0.A1 J0.A12 J0.B1 J0.B12 U2.2 | length 31.1
  Top Layer w0.3: J0.0@-4.13,-41.46 -3.4,-41.46 J0.B1 -2.75,-42.11 J0.A12 ; v1(-3.048,-39.624) -2.665,-40.007 2.413,-40.007 3.175,-40.769 3.175,-41.685 ; U2.2 0,-48.768 0.254,-49.022 1.524,-49.022 2.032,-48.514 v1(2.032,-46.99) ; J0.0@4.13,-41.461 4.086,-41.504 3.356,-41.504 3.175,-41.685 ; B2.1@6.35,-43.307 6.096,-43.561 2.75,-43.561 2.75,-42.11 J0.B12 3.175,-41.685
  Bottom Layer w0.3: v1(-3.048,-39.624) -3.175,-39.751 -3.175,-41.684 J0.B1 ; v1(2.032,-46.99) 4.318,-44.704 4.318,-42.236 4.264,-42.182 4.264,-41.594 J0.0@4.13,-41.46
pads on no net: J0.0@4.49,-37.07 J0.0@-4.49,-37.07 J0.A5 J0.A8 J0.B5 J0.B8 U1.1 U1.2 U1.3 U1.4 U1.7 U1.11 U1.23 U1.24 U1.25 U1.26 U1.30 U1.32 U1.39 U1.40 U1.41 U1.42 U1.43 U1.44 U1.45 U1.46 U1.47 U1.48 U3.4

## Polygon pours and split planes (outlines as drawn)
GND on Bottom Layer "GND_L02_P005" (solid, remove dead copper, pour order 5): -27,-97 -17,-97 -17,-83 11,-83 11,-97 21,-97 21,-68 10,-68 10,-52 16,-52 16,-36 -16,-36 -16,-52 -21,-52 -21,-67 -27,-78
VCC_5V on Bottom Layer "VCC_5V_L02_P004" (solid, pour order 4): -8.636,-46.736 -8.128,-46.228 -7.366,-46.228 -7.112,-46.482 -7.112,-52.451 -11.049,-56.388 -11.049,-65.278 -9.017,-67.31 -1.778,-67.31 -1.524,-67.564 -1.524,-75.438 0.762,-77.724 0.762,-79.248 0.508,-79.502 -1.27,-79.502 -4.318,-76.454 -13.843,-66.929 -13.843,-53.213 -8.636,-48.006
GND on Top Layer "GND_L01_P001" (solid, remove dead copper, pour order 1): -27,-97 -17,-97 -17,-83 11,-83 11,-97 21,-97 21,-68 10,-68 10,-52 16,-52 16,-36 -16,-36 -16,-52 -21,-52 -21,-67 -27,-78

## Keep-outs
Keep-Out Layer:
  circle w0.254: c-17,-55 r1.1
  circle w0.254: c17,-72 r1.1
  circle w0.254: c-13,-39 r1
  circle w0.254: c17,-93 r1.1
  circle w0.254: c13,-39 r1
  circle w0.254: c-23,-93 r1.1
  lines w0.254: -17.018,-96.972 -17.046,-97 -27,-97 -27,-78 -21,-67 -21,-52 ; -17,-97 -17,-83 11,-83 11,-97 21,-97 21,-68 ; -21,-52 -16,-52 ; -21,-52 -16,-52 ; -16,-52 -16,-36 ; -16,-52 -16,-36 ; -16,-36 16,-36 ; 10,-68 10,-52 ; 10,-68 21,-68 ; 10,-68 10,-52 ; 10,-68 21,-68 ; 10,-52 16,-52 ; 10,-52 16,-52 ; 16,-52 16,-36 ; 16,-52 16,-36

## Other copper
Top Layer:
  pour cut-out: -2.032,-55.372 0.98,-55.372 1.535,-55.928 1.54,-55.922 4.327,-55.922 4.327,-56.919 3.797,-57.449 0.192,-57.449
  pour cut-out: -8.955,-56.6 -8.892,-56.663 -8.892,-57.006 -12.729,-60.843 -12.954,-60.618 -12.954,-60.579

## Silkscreen, mask and mechanical layers (free items; w line width, h text height)
Top Overlay:
  circle w0.254: c17,-72 r2.5
  circle w0.254: c-23,-93 r2
  circle w0.254: c-23,-93 r2.5
  circle w0.254: c17,-93 r2.5
  circle w0.254: c13,-39 r2
  circle w0.254: c-13,-39 r2
  circle w0.254: c17,-93 r2
  circle w0.254: c-13,-39 r2
  circle w0.254: c13,-39 r2
  circle w0.254: c13,-39 r2
  circle w0.254: c-17,-55 r2
  circle w0.254: c17,-72 r2
  lines w0.15: -4.826,-34.55 4.826,-34.55
  lines w0.254: -26,-90.5 21,-90.5
  text "DS172-1.0-A" at -15.621,-82.395 h2.5
Bottom Overlay:
  circle w0.254: c17,-72 r2
  circle w0.254: c17,-72 r2.5
  circle w0.254: c-23,-93.01 r2.5
  circle w0.254: c17,-93.01 r2.5
  circle w0.254: c13,-39 r2
  circle w0.254: c-13,-39 r2
  circle w0.254: c-17,-55 r2.5
Mechanical 1:
  circle w0.254: c-23,-93 r1.1
  circle w0.254: c13,-39 r1
  circle w0.254: c17,-93 r1.1
  circle w0.254: c-13,-39 r1
  circle w0.254: c17,-72 r1.1
  circle w0.254: c-17,-55 r1.1
  lines w0.254: -21,-52 -21,-67 -27,-78 -27,-97 -17,-97 -17,-83 11,-83 11,-97 21,-97 21,-68 ; -21,-52 -16,-52 ; -21,-52 -16,-52 ; -16,-52 -16,-36 ; -16,-52 -16,-36 ; -16,-36 16,-36 ; 10,-68 21,-68 ; 10,-68 10,-52 ; 10,-68 21,-68 ; 10,-68 10,-52 ; 10,-52 16,-52 ; 10,-52 16,-52 ; 16,-52 16,-36 ; 16,-52 16,-36
Mechanical 15:
  circle w0.254: c0,-59.48 r1.5
  lines w0.508: -16,-51 16,-51 ; -16,-51 16,-51 ; -16,-51 16,-51

## Text inside footprints (layer, text, board x,y; h text height)
D1: Top Overlay "+" at -2.5,-58.28 h3